# EAGLE board aleph-130128 (EAGLE 6.4), part 1 of 3
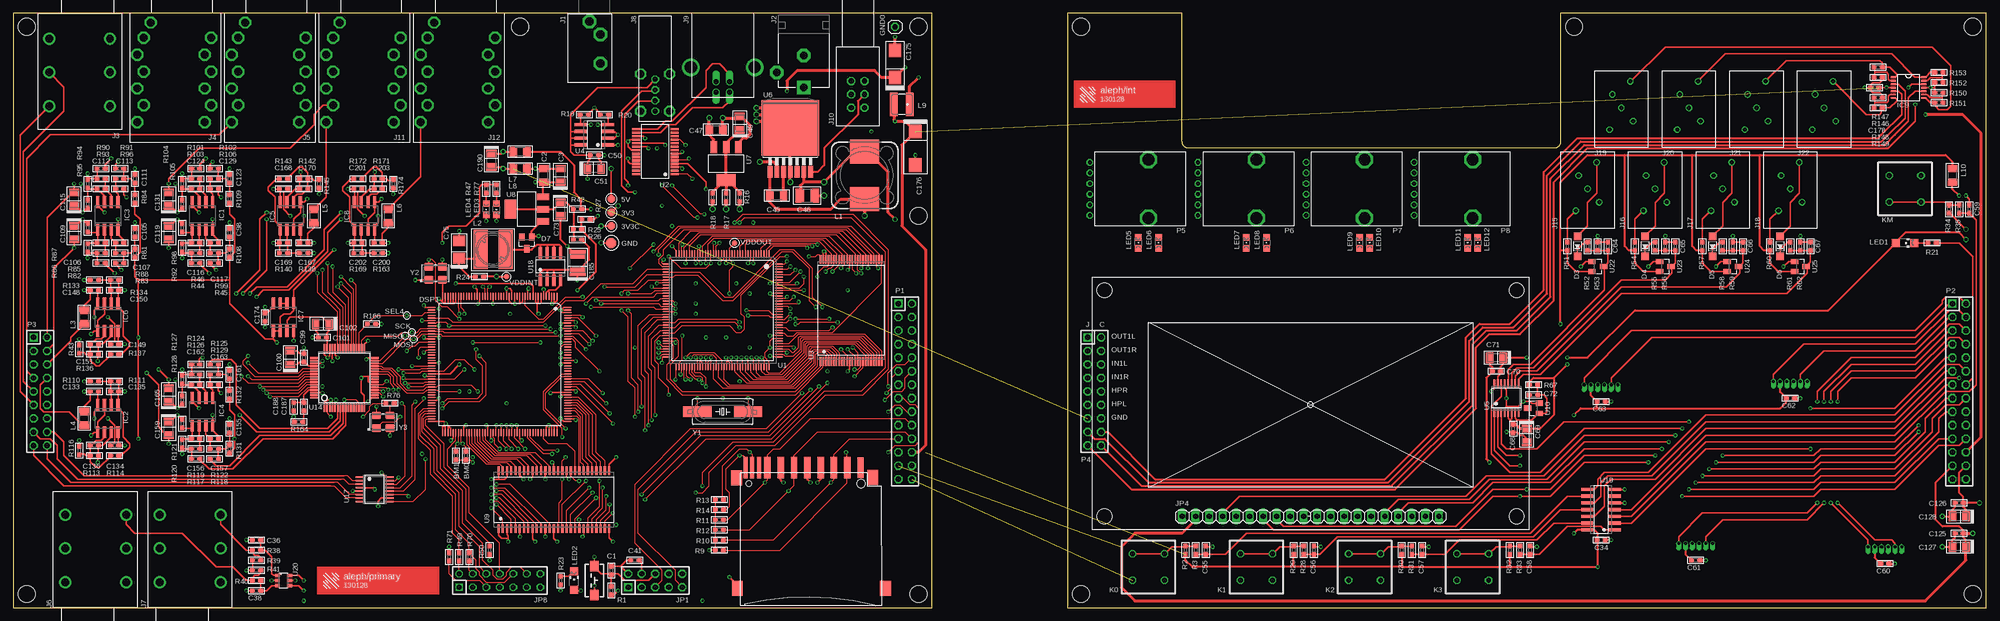
[diagram p0: board, top side]
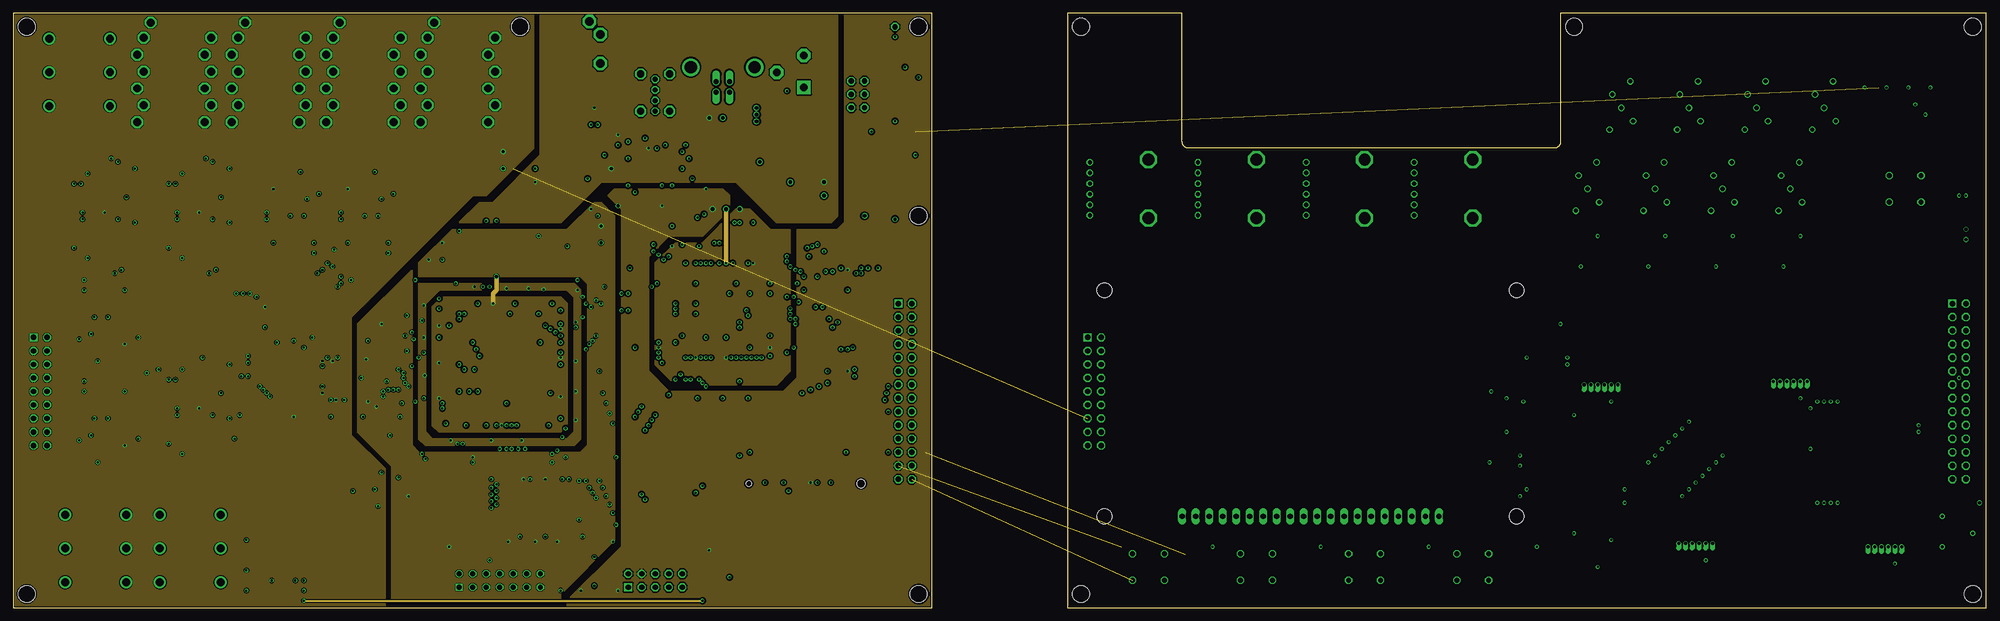
[diagram p1: board, inner layer Route2]
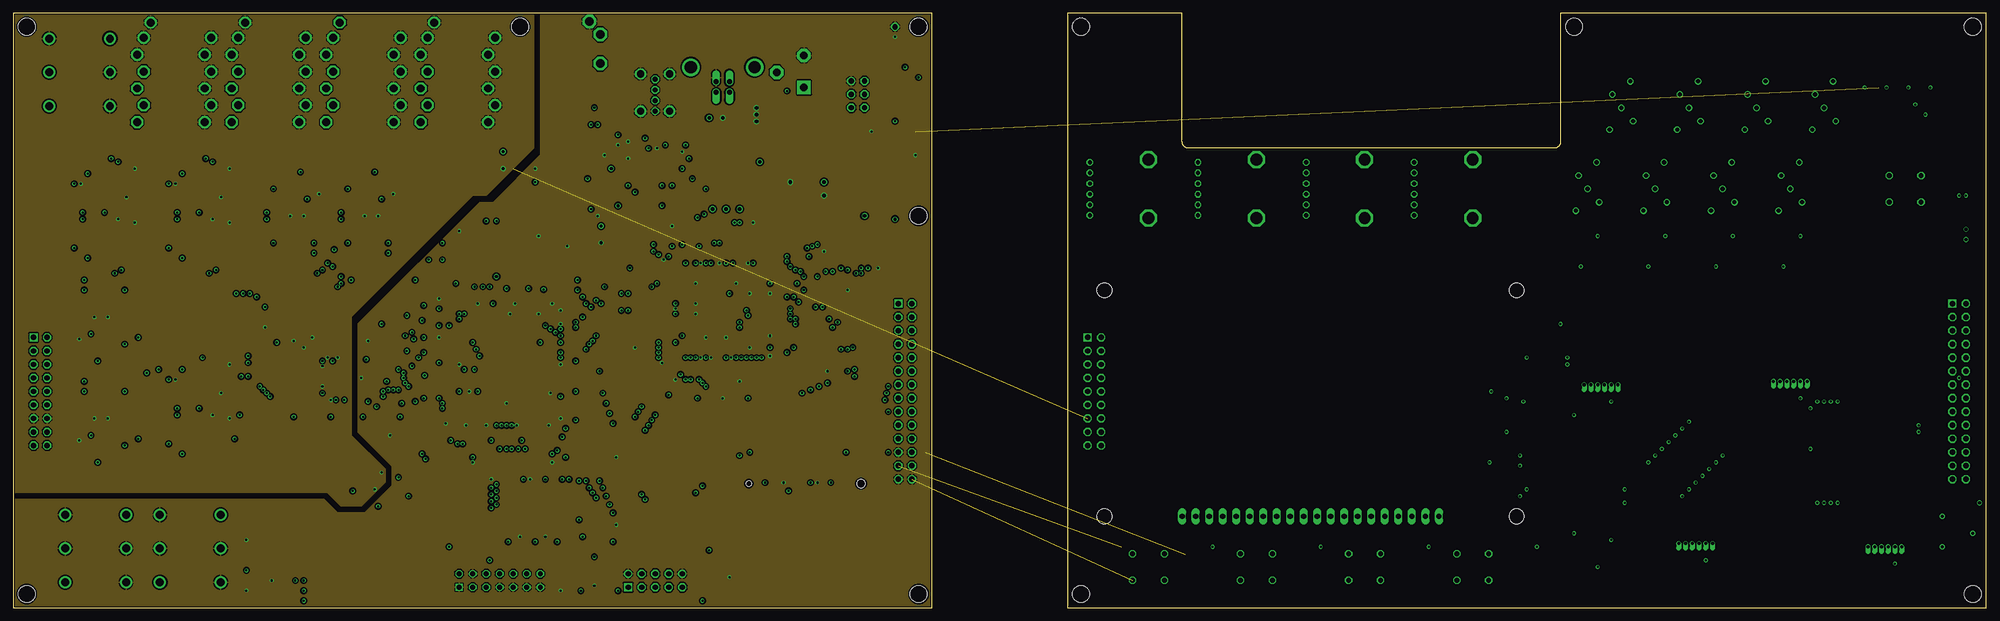
[diagram p2: board, inner layer Route3]
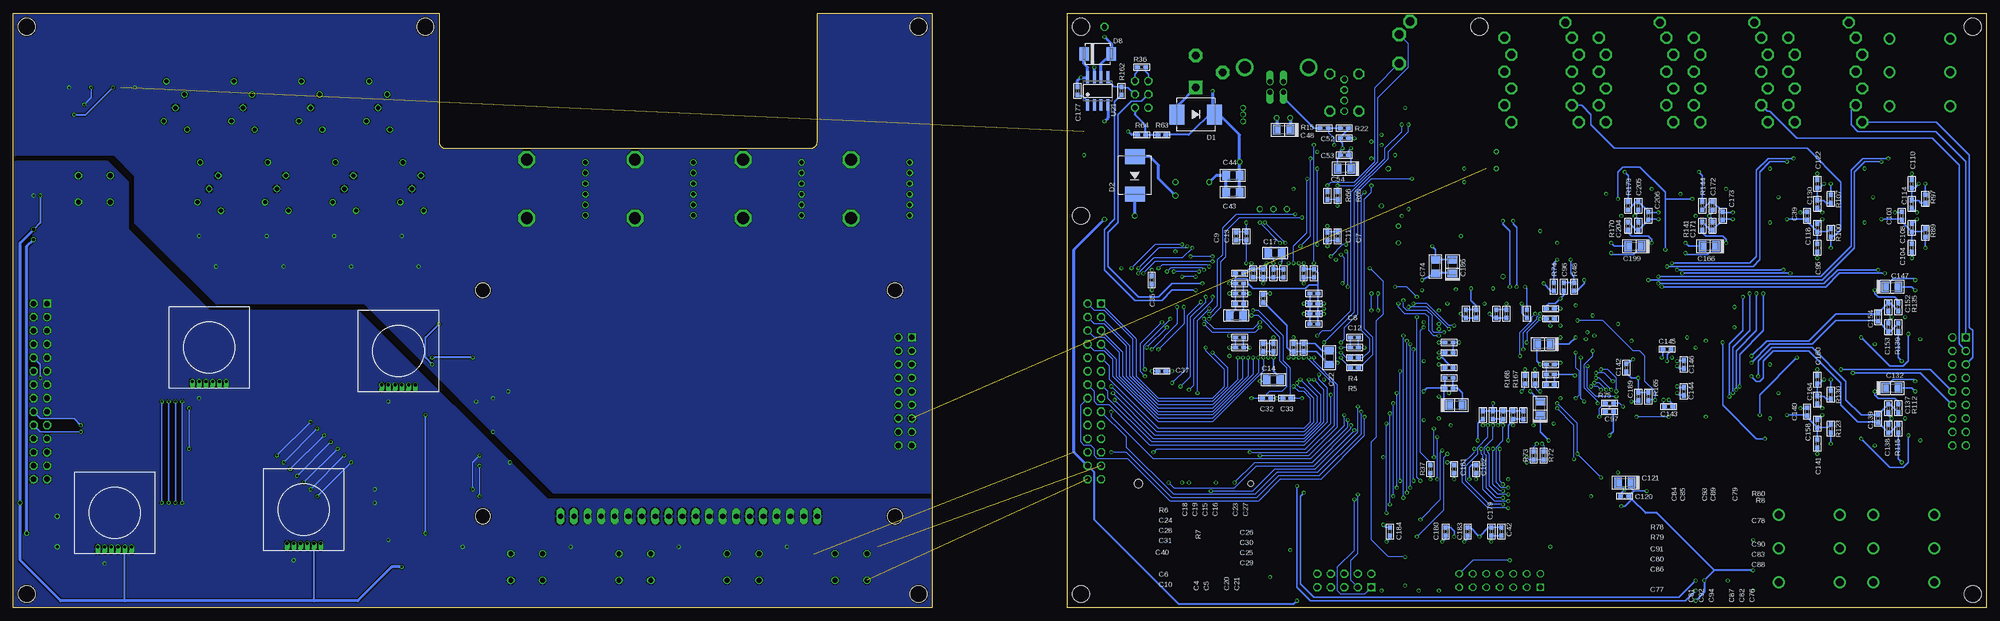
[diagram p3: board, bottom side, seen from below]

Size 370.84 x 111.76 mm. Coordinates in mm from the lower left corner, seen from the top.
Outline: 0,0 172.72,0 172.72,111.76 0,111.76 0,0
Outline: 198.12,0 370.84,0 370.84,111.76 290.83,111.76 290.83,87.63 arc-90 289.56,86.36 220.98,86.36 arc-90 219.71,87.63 219.71,111.76 198.12,111.76 198.12,0
Copper layers (1*2+3*16): Top 0.035mm / dielectric 1.5mm / Route2 0.035mm / dielectric 0.15mm / Route3 0.035mm / dielectric 0.2mm / Bottom 0.035mm
Design rules "default *": minimum track width 6mil, minimum drill 15mil, track to track 6mil, track to pad 6mil, pad to pad 6mil, via to via 6mil, smd to smd 6mil, copper to edge 10mil, drill to drill 8mil, minimum pad ring 6mil, minimum via ring 6mil, stop-mask expansion 4mil, vias tented up to drill 0mil, thermal gap 10mil
Holes 3.2 mm at 170.18,109.22 2.54,109.22 2.54,2.54 170.18,2.54 170.18,73.66 200.66,2.54 200.66,109.22 368.3,109.22 368.3,2.54 293.37,109.22 95.25,109.22
Holes 2.8 mm at 205.1,59.69 282.57,59.69 282.57,17.14 205.1,17.14

## Footprints (pad centres in the part's own frame; a part is rotated, then mirrored left to right if it is on the bottom)
SMD-15R = smd 1.5 x 1.5: TP 0,0
R0603 = smd 0.9 x 0.8: 1 -0.762,0; 2 0.762,0
C0603 = smd 0.9 x 0.8: 1 -0.762,0; 2 0.762,0
C1206 = smd 1.4 x 1.8: 1 -1.27,0; 2 1.27,0
C1206/T = smd 1.4 x 1.9: + 1.27,0; - -1.27,0
C3225 = smd 1.6 x 2.7: 1 -1.397,0; 2 1.397,0
C3528/T = smd 2 x 2.2: + 1.651,0; - -1.651,0
C6032/T = smd 2.6 x 2.2: + 2.54,0; - -2.54,0
C7343/T = smd 2.6 x 2.4: + 3.175,0; - -3.175,0
C1210/T = smd 1.6 x 3: + 1.651,0; - -1.651,0
SMC = smd 2.8 x 3.8: A 3.493,0; C -3.493,0
SOD123 = smd 1.4 x 1.4: A 1.905,0; C -1.905,0
SOT23 = smd 1 x 1.4: 1 -0.95,-1.1; 2 0.95,-1.1; 3 0,1.1
SMB403A = smd 1.778 x 2.54: A 2.54,0; C -2.54,0
LQFP176 = smd 1.5 x 0.25: P$1 -12.8,10.75; P$2 -12.8,10.25; P$3 -12.8,9.75; P$4 -12.8,9.25; P$5 -12.8,8.75; P$6 -12.8,8.25; P$7 -12.8,7.75; P$8 -12.8,7.25; P$9 -12.8,6.75; P$10 -12.8,6.25; P$11 -12.8,5.75; P$12 -12.8,5.25; P$13 -12.8,4.75; P$14 -12.8,4.25; P$15 -12.8,3.75; P$16 -12.8,3.25; P$17 -12.8,2.75; P$18 -12.8,2.25; P$19 -12.8,1.75; P$20 -12.8,1.25; P$21 -12.8,0.75; P$22 -12.8,0.25; P$23 -12.8,-0.25; P$24 -12.8,-0.75; P$25 -12.8,-1.25; P$26 -12.8,-1.75; P$27 -12.8,-2.25; P$28 -12.8,-2.75; P$29 -12.8,-3.25; P$30 -12.8,-3.75; P$31 -12.8,-4.25; P$32 -12.8,-4.75; P$33 -12.8,-5.25; P$34 -12.8,-5.75; P$35 -12.8,-6.25; P$36 -12.8,-6.75; P$37 -12.8,-7.25; P$38 -12.8,-7.75; P$39 -12.8,-8.25; P$40 -12.8,-8.75; P$41 -12.8,-9.25; P$42 -12.8,-9.75; P$43 -12.8,-10.25; P$44 -12.8,-10.75; P$89 12.8,-10.75; P$90 12.8,-10.25; P$91 12.8,-9.75; P$92 12.8,-9.25; P$93 12.8,-8.75; P$94 12.8,-8.25; P$95 12.8,-7.75; P$96 12.8,-7.25; P$97 12.8,-6.75; P$98 12.8,-6.25; P$99 12.8,-5.75; P$100 12.8,-5.25; P$101 12.8,-4.75; P$102 12.8,-4.25; P$103 12.8,-3.75; P$104 12.8,-3.25; P$105 12.8,-2.75; P$106 12.8,-2.25; P$107 12.8,-1.75; P$108 12.8,-1.25; P$109 12.8,-0.75; P$110 12.8,-0.25; P$111 12.8,0.25; P$112 12.8,0.75; P$113 12.8,1.25; P$114 12.8,1.75; P$115 12.8,2.25; P$116 12.8,2.75; P$117 12.8,3.25; P$118 12.8,3.75; P$119 12.8,4.25; P$120 12.8,4.75; P$121 12.8,5.25; P$122 12.8,5.75; P$123 12.8,6.25; P$124 12.8,6.75; P$125 12.8,7.25; P$126 12.8,7.75; P$127 12.8,8.25; P$128 12.8,8.75; P$129 12.8,9.25; P$130 12.8,9.75; P$131 12.8,10.25; P$132 12.8,10.75 | smd 0.25 x 1.5: P$45 -10.75,-12.8; P$46 -10.25,-12.8; P$47 -9.75,-12.8; P$48 -9.25,-12.8; P$49 -8.75,-12.8; P$50 -8.25,-12.8; P$51 -7.75,-12.8; P$52 -7.25,-12.8; P$53 -6.75,-12.8; P$54 -6.25,-12.8; P$55 -5.75,-12.8; P$56 -5.25,-12.8; P$57 -4.75,-12.8; P$58 -4.25,-12.8; P$59 -3.75,-12.8; P$60 -3.25,-12.8; P$61 -2.75,-12.8; P$62 -2.25,-12.8; P$63 -1.75,-12.8; P$64 -1.25,-12.8; P$65 -0.75,-12.8; P$66 -0.25,-12.8; P$67 0.25,-12.8; P$68 0.75,-12.8; P$69 1.25,-12.8; P$70 1.75,-12.8; P$71 2.25,-12.8; P$72 2.75,-12.8; P$73 3.25,-12.8; P$74 3.75,-12.8; P$75 4.25,-12.8; P$76 4.75,-12.8; P$77 5.25,-12.8; P$78 5.75,-12.8; P$79 6.25,-12.8; P$80 6.75,-12.8; P$81 7.25,-12.8; P$82 7.75,-12.8; P$83 8.25,-12.8; P$84 8.75,-12.8; P$85 9.25,-12.8; P$86 9.75,-12.8; P$87 10.25,-12.8; P$88 10.75,-12.8; P$133 10.75,12.8; P$134 10.25,12.8; P$135 9.75,12.8; P$136 9.25,12.8; P$137 8.75,12.8; P$138 8.25,12.8; P$139 7.75,12.8; P$140 7.25,12.8; P$141 6.75,12.8; P$142 6.25,12.8; P$143 5.75,12.8; P$144 5.25,12.8; P$145 4.75,12.8; P$146 4.25,12.8; P$147 3.75,12.8; P$148 3.25,12.8; P$149 2.75,12.8; P$150 2.25,12.8; P$151 1.75,12.8; P$152 1.25,12.8; P$153 0.75,12.8; P$154 0.25,12.8; P$155 -0.25,12.8; P$156 -0.75,12.8; P$157 -1.25,12.8; P$158 -1.75,12.8; P$159 -2.25,12.8; P$160 -2.75,12.8; P$161 -3.25,12.8; P$162 -3.75,12.8; P$163 -4.25,12.8; P$164 -4.75,12.8; P$165 -5.25,12.8; P$166 -5.75,12.8; P$167 -6.25,12.8; P$168 -6.75,12.8; P$169 -7.25,12.8; P$170 -7.75,12.8; P$171 -8.25,12.8; P$172 -8.75,12.8; P$173 -9.25,12.8; P$174 -9.75,12.8; P$175 -10.25,12.8; P$176 -10.75,12.8
SMD-20R = smd 2 x 2: TP 0,0
1X01 = drill 1.016 octagon: 1 0,0
SO8 = smd 0.6 x 2.2: 1 -1.905,-2.6; 2 -0.635,-2.6; 3 0.635,-2.6; 4 1.905,-2.6; 5 1.905,2.6; 6 0.635,2.6; 7 -0.635,2.6; 8 -1.905,2.6
TSSOP14 = smd 0.9 x 0.35: 1 -2.875,1.95; 2 -2.875,1.3; 3 -2.875,0.65; 4 -2.875,0; 5 -2.875,-0.65; 6 -2.875,-1.3; 7 -2.875,-1.95; 8 2.875,-1.95; 9 2.875,-1.3; 10 2.875,-0.65; 11 2.875,0; 12 2.875,0.65; 13 2.875,1.3; 14 2.875,1.95
SJ1-3533NG = drill 1.6 pad 2.54 octagon: 1 -1,-0.9; 2 1.4,1.1; 3 6.9,1.1
PJ-102XH = drill 1.422 pad 2.54 square: 1 0,0 | drill 1.422 pad 2.54 octagon: 2 0,-6.032; 3 5.08,-2.857
NEUTRIK-NRJ6HM-1 = drill 1.5: R 7.23,11.1; RN -4.2,11.1; S 7.23,4.75; SN -4.2,4.75; T 7.23,17.45; TN -4.2,17.45
NSJ12HF = drill 1.5 octagon: G -1.73,5.96; RB -10.95,7.23; RNB -10.95,-5.47; RNT -14.13,-4.2; RT -14.13,8.5; SB -4.606,7.23; SNB -4.606,-5.47; SNT -7.78,-4.2; ST -7.78,8.5; TB -17.3,7.23; TNB -17.3,-5.47; TNT -20.48,-4.2; TT -20.48,8.5
USBA-VERT = drill 0.92 octagon: 1 0,-6; 2 0,-4; 3 0,-2; 4 0,0 | drill 1.35 octagon: G1 -2.72,0; G2 -2.72,-7; G3 2.72,-7; G4 2.72,0
USB_B = drill 0.95 offset: DM -1.25,4.71; DP -1.25,2.71; GND 1.25,2.71; VCC 1.25,4.71 | drill 2.3: MOUNT1 -6,0; MOUNT2 6,0
PHA2U = drill 1 octagon: 0 -1.25,0; 1 -1.25,-2.5; 2 -1.25,2.5; _0 1.25,0; _1 1.25,-2.5; _2 1.25,2.5
STX-3680 = drill 0.8: 1 -2.2,-4.1; 2 2.2,-2.5; 3 -1.7,2.5; 4 1.7,5; 5 0,0
AVR-JTAG-10 = drill 1.016 square: 1 -5.08,-1.27 | drill 1.016 octagon: 2 -5.08,1.27; 3 -2.54,-1.27; 4 -2.54,1.27; 5 0,-1.27; 6 0,1.27; 7 2.54,-1.27; 8 2.54,1.27; 9 5.08,-1.27; 10 5.08,1.27
1X20 = drill 1.016 long: 1 -24.13,0; 2 -21.59,0; 3 -19.05,0; 4 -16.51,0; 5 -13.97,0; 6 -11.43,0; 7 -8.89,0; 8 -6.35,0; 9 -3.81,0; 10 -1.27,0; 11 1.27,0; 12 3.81,0; 13 6.35,0; 14 8.89,0; 15 11.43,0; 16 13.97,0; 17 16.51,0; 18 19.05,0; 19 21.59,0; 20 24.13,0
JPQ-07 = drill 0.914 square: 1 -7.62,-1.27 | drill 0.914 octagon: 2 -7.62,1.27; 3 -5.08,-1.27; 4 -5.08,1.27; 5 -2.54,-1.27; 6 -2.54,1.27; 7 0,-1.27; 8 0,1.27; 9 2.54,-1.27; 10 2.54,1.27; 11 5.08,-1.27; 12 5.08,1.27; 13 7.62,-1.27; 14 7.62,1.27
PVA1 = drill 0.9 octagon: 1 -3,-2.5; 2 -3,2.5; 3 3,2.5; 4 3,-2.5
MSS1278 = smd 5.5 x 4.5: 1 0,4.5; 2 0,-4.5
SRR6038 = smd 7.3 x 2.6: 1 0,2.35; 2 0,-2.35
L1206 = smd 1.4 x 1.8: 1 -1.27,0; 2 1.27,0
LPS4018 = smd 1.45 x 4.4: 1 -1.5,0; 2 1.5,0
CHIPLED_1206 = smd 1.5 x 1.5: A 0,-1.75; C 0,1.75
CHIPLED_0805 = smd 1.2 x 1.2: A 0,-1.05; C 0,1.05
DIL-100-2X14 = drill 1.016 square: 1 -16.51,-1.27 | drill 1.016 octagon: 2 -16.51,1.27; 3 -13.97,-1.27; 4 -13.97,1.27; 5 -11.43,-1.27; 6 -11.43,1.27; 7 -8.89,-1.27; 8 -8.89,1.27; 9 -6.35,-1.27; 10 -6.35,1.27; 11 -3.81,-1.27; 12 -3.81,1.27; 13 -1.27,-1.27; 14 -1.27,1.27; 15 1.27,-1.27; 16 1.27,1.27; 17 3.81,-1.27; 18 3.81,1.27; 19 6.35,-1.27; 20 6.35,1.27; 21 8.89,-1.27; 22 8.89,1.27; 23 11.43,-1.27; 24 11.43,1.27; 25 13.97,-1.27; 26 13.97,1.27; 27 16.51,-1.27; 28 16.51,1.27
DIL-100-2X09 = drill 1.016 square: 1 -10.16,-1.27 | drill 1.016 octagon: 2 -10.16,1.27; 3 -7.62,-1.27; 4 -7.62,1.27; 5 -5.08,-1.27; 6 -5.08,1.27; 7 -2.54,-1.27; 8 -2.54,1.27; 9 0,-1.27; 10 0,1.27; 11 2.54,-1.27; 12 2.54,1.27; 13 5.08,-1.27; 14 5.08,1.27; 15 7.62,-1.27; 16 7.62,1.27; 17 10.16,-1.27; 18 10.16,1.27
EVJ-POT = drill 0.8 octagon: 1 -5,-11; 2 -3,-11; 3 -1,-11; 4 1,-11; 5 3,-11; 6 5,-11 | drill 2.2 octagon: M1 -5.5,0; M2 5.5,0
LQFP144 = smd 0.25 x 1.5: 1 -8.75,-10.6; 2 -8.25,-10.6; 3 -7.75,-10.6; 4 -7.25,-10.6; 5 -6.75,-10.6; 6 -6.25,-10.6; 7 -5.75,-10.6; 8 -5.25,-10.6; 9 -4.75,-10.6; 10 -4.25,-10.6; 11 -3.75,-10.6; 12 -3.25,-10.6; 13 -2.75,-10.6; 14 -2.25,-10.6; 15 -1.75,-10.6; 16 -1.25,-10.6; 17 -0.75,-10.6; 18 -0.25,-10.6; 19 0.25,-10.6; 20 0.75,-10.6; 21 1.25,-10.6; 22 1.75,-10.6; 23 2.25,-10.6; 24 2.75,-10.6; 25 3.25,-10.6; 26 3.75,-10.6; 27 4.25,-10.6; 28 4.75,-10.6; 29 5.25,-10.6; 30 5.75,-10.6; 31 6.25,-10.6; 32 6.75,-10.6; 33 7.25,-10.6; 34 7.75,-10.6; 35 8.25,-10.6; 36 8.75,-10.6; 73 8.75,10.6; 74 8.25,10.6; 75 7.75,10.6; 76 7.25,10.6; 77 6.75,10.6; 78 6.25,10.6; 79 5.75,10.6; 80 5.25,10.6; 81 4.75,10.6; 82 4.25,10.6; 83 3.75,10.6; 84 3.25,10.6; 85 2.75,10.6; 86 2.25,10.6; 87 1.75,10.6; 88 1.25,10.6; 89 0.75,10.6; 90 0.25,10.6; 91 -0.25,10.6; 92 -0.75,10.6; 93 -1.25,10.6; 94 -1.75,10.6; 95 -2.25,10.6; 96 -2.75,10.6; 97 -3.25,10.6; 98 -3.75,10.6; 99 -4.25,10.6; 100 -4.75,10.6; 101 -5.25,10.6; 102 -5.75,10.6; 103 -6.25,10.6; 104 -6.75,10.6; 105 -7.25,10.6; 106 -7.75,10.6; 107 -8.25,10.6; 108 -8.75,10.6 | smd 1.5 x 0.25: 37 10.6,-8.75; 38 10.6,-8.25; 39 10.6,-7.75; 40 10.6,-7.25; 41 10.6,-6.75; 42 10.6,-6.25; 43 10.6,-5.75; 44 10.6,-5.25; 45 10.6,-4.75; 46 10.6,-4.25; 47 10.6,-3.75; 48 10.6,-3.25; 49 10.6,-2.75; 50 10.6,-2.25; 51 10.6,-1.75; 52 10.6,-1.25; 53 10.6,-0.75; 54 10.6,-0.25; 55 10.6,0.25; 56 10.6,0.75; 57 10.6,1.25; 58 10.6,1.75; 59 10.6,2.25; 60 10.6,2.75; 61 10.6,3.25; 62 10.6,3.75; 63 10.6,4.25; 64 10.6,4.75; 65 10.6,5.25; 66 10.6,5.75; 67 10.6,6.25; 68 10.6,6.75; 69 10.6,7.25; 70 10.6,7.75; 71 10.6,8.25; 72 10.6,8.75; 109 -10.6,8.75; 110 -10.6,8.25; 111 -10.6,7.75; 112 -10.6,7.25; 113 -10.6,6.75; 114 -10.6,6.25; 115 -10.6,5.75; 116 -10.6,5.25; 117 -10.6,4.75; 118 -10.6,4.25; 119 -10.6,3.75; 120 -10.6,3.25; 121 -10.6,2.75; 122 -10.6,2.25; 123 -10.6,1.75; 124 -10.6,1.25; 125 -10.6,0.75; 126 -10.6,0.25; 127 -10.6,-0.25; 128 -10.6,-0.75; 129 -10.6,-1.25; 130 -10.6,-1.75; 131 -10.6,-2.25; 132 -10.6,-2.75; 133 -10.6,-3.25; 134 -10.6,-3.75; 135 -10.6,-4.25; 136 -10.6,-4.75; 137 -10.6,-5.25; 138 -10.6,-5.75; 139 -10.6,-6.25; 140 -10.6,-6.75; 141 -10.6,-7.25; 142 -10.6,-7.75; 143 -10.6,-8.25; 144 -10.6,-8.75
SSOP28 = smd 0.4 x 1.5: 1 -4.225,-3.625; 2 -3.575,-3.625; 3 -2.925,-3.625; 4 -2.275,-3.625; 5 -1.625,-3.625; 6 -0.975,-3.625; 7 -0.325,-3.625; 8 0.325,-3.625; 9 0.975,-3.625; 10 1.625,-3.625; 11 2.275,-3.625; 12 2.925,-3.625; 13 3.575,-3.625; 14 4.225,-3.625; 15 4.225,3.625; 16 3.575,3.625; 17 2.925,3.625; 18 2.275,3.625; 19 1.625,3.625; 20 0.975,3.625; 21 0.325,3.625; 22 -0.325,3.625; 23 -0.975,3.625; 24 -1.625,3.625; 25 -2.275,3.625; 26 -2.925,3.625; 27 -3.575,3.625; 28 -4.225,3.625
TSOP48 = smd 0.3 x 1.6: 1 -5.75,-9.6; 2 -5.25,-9.6; 3 -4.75,-9.6; 4 -4.25,-9.6; 5 -3.75,-9.6; 6 -3.25,-9.6; 7 -2.75,-9.6; 8 -2.25,-9.6; 9 -1.75,-9.6; 10 -1.25,-9.6; 11 -0.75,-9.6; 12 -0.25,-9.6; 13 0.25,-9.6; 14 0.75,-9.6; 15 1.25,-9.6; 16 1.75,-9.6; 17 2.25,-9.6; 18 2.75,-9.6; 19 3.25,-9.6; 20 3.75,-9.6; 21 4.25,-9.6; 22 4.75,-9.6; 23 5.25,-9.6; 24 5.75,-9.6; 25 5.75,9.6; 26 5.25,9.6; 27 4.75,9.6; 28 4.25,9.6; 29 3.75,9.6; 30 3.25,9.6; 31 2.75,9.6; 32 2.25,9.6; 33 1.75,9.6; 34 1.25,9.6; 35 0.75,9.6; 36 0.25,9.6; 37 -0.25,9.6; 38 -0.75,9.6; 39 -1.25,9.6; 40 -1.75,9.6; 41 -2.25,9.6; 42 -2.75,9.6; 43 -3.25,9.6; 44 -3.75,9.6; 45 -4.25,9.6; 46 -4.75,9.6; 47 -5.25,9.6; 48 -5.75,9.6
SO08 = smd 0.6 x 2.2: 1 -1.905,-2.6; 2 -0.635,-2.6; 3 0.635,-2.6; 4 1.905,-2.6; 5 1.905,2.6; 6 0.635,2.6; 7 -0.635,2.6; 8 -1.905,2.6
TSSOP16 = smd 0.3 x 1.5: 1 -2.275,-2.8; 2 -1.625,-2.8; 3 -0.975,-2.8; 4 -0.325,-2.8; 5 0.325,-2.8; 6 0.975,-2.8; 7 1.625,-2.8; 8 2.275,-2.8; 9 2.275,2.8; 10 1.625,2.8; 11 0.975,2.8; 12 0.325,2.8; 13 -0.325,2.8; 14 -0.975,2.8; 15 -1.625,2.8; 16 -2.275,2.8
TO263-7 = smd 0.914 x 2.159: 1 -3.81,-5.715; 2 -2.54,-5.715; 3 -1.27,-5.715; 4 0,-5.715; 5 1.27,-5.715; 6 2.54,-5.715; 7 3.81,-5.715 | smd 10.8 x 10.41: 8 0,2.54
SOT223 = smd 1.219 x 2.235: 1 -2.311,-3.099; 2 0,-3.099; 3 2.311,-3.099 | smd 3.6 x 2.2: 4 0,3.099
TSOP54 = smd 0.4 x 1.6: 1 -10.4,-5.45; 2 -9.6,-5.45; 3 -8.8,-5.45; 4 -8,-5.45; 5 -7.2,-5.45; 6 -6.4,-5.45; 7 -5.6,-5.45; 8 -4.8,-5.45; 9 -4,-5.45; 10 -3.2,-5.45; 11 -2.4,-5.45; 12 -1.6,-5.45; 13 -0.8,-5.45; 14 0,-5.45; 15 0.8,-5.45; 16 1.6,-5.45; 17 2.4,-5.45; 18 3.2,-5.45; 19 4,-5.45; 20 4.8,-5.45; 21 5.6,-5.45; 22 6.4,-5.45; 23 7.2,-5.45; 24 8,-5.45; 25 8.8,-5.45; 26 9.6,-5.45; 27 10.4,-5.45; 28 10.4,5.45; 29 9.6,5.45; 30 8.8,5.45; 31 8,5.45; 32 7.2,5.45; 33 6.4,5.45; 34 5.6,5.45; 35 4.8,5.45; 36 4,5.45; 37 3.2,5.45; 38 2.4,5.45; 39 1.6,5.45; 40 0.8,5.45; 41 0,5.45; 42 -0.8,5.45; 43 -1.6,5.45; 44 -2.4,5.45; 45 -3.2,5.45; 46 -4,5.45; 47 -4.8,5.45; 48 -5.6,5.45; 49 -6.4,5.45; 50 -7.2,5.45; 51 -8,5.45; 52 -8.8,5.45; 53 -9.6,5.45; 54 -10.4,5.45
SQFP-S-10X10-64 = smd 0.3 x 1.6: 1 -3.75,-5.6; 2 -3.25,-5.6; 3 -2.75,-5.6; 4 -2.25,-5.6; 5 -1.75,-5.6; 6 -1.25,-5.6; 7 -0.75,-5.6; 8 -0.25,-5.6; 9 0.25,-5.6; 10 0.75,-5.6; 11 1.25,-5.6; 12 1.75,-5.6; 13 2.25,-5.6; 14 2.75,-5.6; 15 3.25,-5.6; 16 3.75,-5.6; 33 3.75,5.6; 34 3.25,5.6; 35 2.75,5.6; 36 2.25,5.6; 37 1.75,5.6; 38 1.25,5.6; 39 0.75,5.6; 40 0.25,5.6; 41 -0.25,5.6; 42 -0.75,5.6; 43 -1.25,5.6; 44 -1.75,5.6; 45 -2.25,5.6; 46 -2.75,5.6; 47 -3.25,5.6; 48 -3.75,5.6 | smd 1.6 x 0.3: 17 5.6,-3.75; 18 5.6,-3.25; 19 5.6,-2.75; 20 5.6,-2.25; 21 5.6,-1.75; 22 5.6,-1.25; 23 5.6,-0.75; 24 5.6,-0.25; 25 5.6,0.25; 26 5.6,0.75; 27 5.6,1.25; 28 5.6,1.75; 29 5.6,2.25; 30 5.6,2.75; 31 5.6,3.25; 32 5.6,3.75; 49 -5.6,3.75; 50 -5.6,3.25; 51 -5.6,2.75; 52 -5.6,2.25; 53 -5.6,1.75; 54 -5.6,1.25; 55 -5.6,0.75; 56 -5.6,0.25; 57 -5.6,-0.25; 58 -5.6,-0.75; 59 -5.6,-1.25; 60 -5.6,-1.75; 61 -5.6,-2.25; 62 -5.6,-2.75; 63 -5.6,-3.25; 64 -5.6,-3.75
SO14 = smd 0.6 x 2.2: 1 -3.81,-2.6; 2 -2.54,-2.6; 3 -1.27,-2.6; 4 0,-2.6; 5 1.27,-2.6; 6 2.54,-2.6; 7 3.81,-2.6; 8 3.81,2.6; 9 2.54,2.6; 10 1.27,2.6; 11 0,2.6; 12 -1.27,2.6; 13 -2.54,2.6; 14 -3.81,2.6
SOT23-6 = smd 0.6 x 0.9: 1 -0.95,-1.15; 2 0,-1.15; 3 0.95,-1.15; 4 0.95,1.15; 5 0,1.15; 6 -0.95,1.15
PANASONIC-EVQ = smd 2 x 1.6: 1 2.7,0; 2 -2.7,0
BOURNS-EM14 = drill 0.6 pad 0.813 offset: P$1 -3.175,-6.35; P$2 -1.905,-6.35; P$3 -0.635,-6.35; P$4 0.635,-6.35; P$5 1.905,-6.35; P$6 3.175,-6.35
06132 = smd 1.2 x 4: 1 6.9,0.9; 2 4.4,0.9; 3 1.9,0.9; 4 -0.6,0.9; 5 -3.1,0.9; 6 -5.6,0.9; 7 -8.1,0.9 | smd 0.7 x 4: 8 -9.7,0.9; CD -11,0.9; WP -12.2,0.9 | smd 1.2 x 3.81: 9 9.4,0.9 | smd 2 x 2.8: GP -13.8,-21.8; GP2 14.1,-21.8; GP3 11.7,-0.9; GP4 -13.9,-1 | hole 1.1: -11.6,-2.1 | hole 1.6: 9.5,-2.1
SMD-10R = smd 1 x 1: TP 0,0
HC49UP@1 = smd 5.334 x 1.93: 1 -4.763,0; 2 4.763,0
ASFL1 = smd 1.7 x 1.5: 1 -1.27,-1.2; 2 1.27,-1.2; 3 1.27,1.2; 4 -1.27,1.2

## Placement (x,y rotation side)
3V3  TPS-SMD-15R  [SMD-15R]  112.39,74.3 0 top
3V3C  TPS-SMD-15R  [SMD-15R]  112.39,71.75 0 top
5V  TPS-SMD-15R  [SMD-15R]  112.39,76.83 0 top
BM0  0  [R0603]  85.09,28.57 90 top
BM1  DNP  [R0603]  83.19,28.57 90 top
C1  100n  [C0603]  112.39,6.99 90 top
C2  100n  [C1206]  99.69,81.28 270 top
C3  10u  [C1206/T]  102.87,81.28 270 top
C4  100n  [C0603]  135.89,48.9 90 bottom
C5  33n  [C0603]  133.99,48.9 90 bottom
C6  100n  [C0603]  140.34,50.8 0 bottom
C7  100n  [C0603]  121.92,69.85 90 bottom
C8  100n  [C0603]  118.75,50.8 0 bottom
C9  100n  [C0603]  140.97,69.85 90 bottom
C10  33n  [C0603]  140.34,48.9 0 bottom
C11  33n  [C0603]  123.83,69.85 90 bottom
C12  33n  [C0603]  118.75,48.9 0 bottom
C13  33n  [C0603]  139.06,69.85 90 bottom
C14  4.7u  [C1206]  133.99,42.86 180 bottom
C15  33n  [C0603]  133.99,62.87 270 bottom
C16  100n  [C0603]  132.08,62.87 270 bottom
C17  4.7u  [C1206]  133.67,66.67 0 bottom
C18  2.2u  [C0603]  137.79,62.87 270 bottom
C19  470p  [C0603]  135.89,62.87 270 bottom
C20  2.7n  [C0603]  130.18,48.9 90 bottom
C21  33n  [C0603]  128.27,48.9 90 bottom
C22  2.2u  [C1206]  123.51,46.99 90 bottom
C23  2.7n  [C0603]  128.27,62.87 270 bottom
C24  2.7n  [C0603]  140.34,60.96 0 bottom
C25  2.7n  [C0603]  126.36,55.24 180 bottom
C26  2.7n  [C0603]  126.36,59.05 180 bottom
C27  33n  [C0603]  126.36,62.87 270 bottom
C28  33n  [C0603]  140.34,59.05 0 bottom
C29  33n  [C0603]  126.36,53.34 180 bottom
C30  33n  [C0603]  126.36,57.15 180 bottom
C31  100n  [C0603]  140.34,57.15 0 bottom
C32  18p  [C0603]  135.25,39.37 0 bottom
C33  18p  [C0603]  131.44,39.37 180 bottom
C34  100n  [C0603]  298.45,12.7 180 top
C35  10n  [C0603]  156.84,61.59 270 bottom
C36  1u  [C0603]  45.72,12.7 0 top
C37  10n  [C0603]  154.94,44.45 0 bottom
C38  1u  [C0603]  45.72,3.17 0 top
C39  100n  [C0603]  33.66,73.66 90 bottom
C40  2.2u  [C1206]  140.97,54.93 0 bottom
C41  100n  [C0603]  116.84,8.89 180 top
C42  10n  [C0603]  91.12,14.29 270 bottom
C43  22u  [C1206]  141.6,78.11 0 bottom
C44  470n  [C1206]  141.6,81.28 0 bottom
C45  10n  [C1206]  143.51,77.47 0 top
C46  47u  [C3225]  149.22,77.47 0 top
C47  100n  [C1206]  132.08,89.85 180 top
C48  10u  [C1206/T]  132.08,89.85 0 bottom
C49  10u  [C1206/T]  136.53,91.12 270 top
C50  100n  [C0603]  109.22,85.09 180 top
C51  4.7u  [C1206/T]  109.22,82.55 180 top
C52  100n  [C0603]  120.65,88.27 0 bottom
C53  100n  [C0603]  120.65,85.09 0 bottom
C54  4.7u  [C1206/T]  120.65,82.55 0 bottom
C55  1u  [C0603]  224.16,10.79 270 top
C56  1u  [C0603]  244.47,10.79 270 top
C57  1u  [C0603]  264.8,10.79 270 top
C58  1u  [C0603]  285.12,10.79 270 top
C59  1u  [C0603]  367.67,74.93 270 top
C60  100n  [C0603]  351.79,8.26 180 top
C61  100n  [C0603]  316.23,8.89 180 top
C62  100n  [C0603]  334.01,39.37 180 top
C63  100n  [C0603]  298.45,38.73 180 top
C64  10n  [C0603]  299.72,67.94 90 top
C65  10n  [C0603]  312.42,67.94 90 top
C66  10n  [C0603]  325.12,67.94 90 top
C67  10n  [C0603]  337.82,67.94 90 top
C68  100n  [C0603]  281.94,33.66 90 top
C69  10u  [C1206/T]  284.48,32.38 90 top
C70  100n  [C0603]  278.76,44.45 0 top
C71  10u  [C1206/T]  278.76,46.99 0 top
C72  100n  [C0603]  285.75,40.01 0 top
C73  10u  [C1206/T]  102.87,74.93 90 top
C74  100n  [C1206]  103.5,64.14 270 bottom
C75  100u  [C3528/T]  83.82,67.31 270 top
C76  10u  [C1206/T]  83.82,37.47 270 bottom
C77  10u  [C1206/T]  99.69,38.1 180 bottom
C78  10u  [C1206/T]  83.19,49.53 0 bottom
C79  100n  [C0603]  86.36,55.24 90 bottom
C80  100n  [C0603]  100.97,43.18 180 bottom
C81  100n  [C0603]  94.61,36.2 270 bottom
C82  100n  [C0603]  88.9,36.2 270 bottom
C83  100n  [C0603]  81.92,43.81 0 bottom
C84  100n  [C0603]  97.79,55.24 90 bottom
C85  10n  [C0603]  95.89,55.24 90 bottom
C86  10n  [C0603]  100.97,41.27 180 bottom
C87  10n  [C0603]  87,36.2 270 bottom
C88  10n  [C0603]  81.92,41.91 0 bottom
C89  100n  [C0603]  90.17,55.24 90 bottom
C90  100n  [C0603]  81.92,45.72 0 bottom
C91  100n  [C0603]  100.97,45.09 0 bottom
C92  100n  [C0603]  92.71,36.2 270 bottom
C93  10n  [C0603]  92.08,55.24 90 bottom
C94  10n  [C0603]  90.81,36.2 270 bottom
C95  330p  [C0603]  31.75,67.63 270 bottom
C96  10n  [C0603]  79.38,60.33 270 bottom
C97  10n  [C0603]  70.8,36.83 0 bottom
C98  680p  [C0603]  40.64,70.48 90 top
C99  100n  [C0603]  54.61,46.99 270 top
C100  47u  [C1206/T]  52.07,46.99 270 top
C101  100n  [C0603]  58.1,50.8 0 top
C102  10u  [C1206/T]  58.1,53.34 0 top
C103  100n  [C0603]  15.88,73.66 90 bottom
C104  330p  [C0603]  13.97,67.63 270 bottom
C105  680p  [C0603]  22.86,70.48 90 top
C106  100p  [C0603]  16.51,68.58 180 top
C107  220p  [C0603]  20,68.58 180 top
C108  2200p  [C0603]  13.97,71.44 90 bottom
C109  10u  [C1206/T]  11.43,70.48 90 top
C110  330p  [C0603]  13.97,79.69 90 bottom
C111  680p  [C0603]  22.86,80.64 90 top
C112  100p  [C0603]  16.51,78.74 180 top
C113  220p  [C0603]  20,78.74 180 top
C114  2200p  [C0603]  13.97,75.88 270 bottom
C115  10u  [C1206/T]  11.43,76.83 270 top
C116  100p  [C0603]  34.29,68.58 180 top
C117  220p  [C0603]  37.78,68.58 180 top
C118  2200p  [C0603]  31.75,71.44 90 bottom
C119  10u  [C1206/T]  29.21,70.48 90 top
C120  100n  [C0603]  67.94,20.95 180 bottom
C121  10u  [C1206/T]  67.94,23.5 0 bottom
C122  330p  [C0603]  31.75,79.69 90 bottom
C123  680p  [C0603]  40.64,80.64 90 top
C124  100p  [C0603]  34.29,78.74 180 top
C125  100n  [C0603]  365.76,13.97 0 top
C126  100n  [C0603]  365.76,19.68 0 top
C127  10u  [C1206/T]  365.76,11.43 0 top
C128  10u  [C1206/T]  365.76,17.14 0 top
C129  220p  [C0603]  37.78,78.74 180 top
C130  2200p  [C0603]  31.75,75.88 270 bottom
C131  10u  [C1206/T]  29.21,76.83 270 top
C132  4.7u  [C1206/T]  17.78,41.27 180 bottom
C133  100p  [C0603]  15.24,40.64 180 top
C134  100n  [C0603]  19.05,30.48 0 top
C135  120p  [C0603]  19.05,40.64 180 top
C136  120p  [C0603]  15.24,30.48 180 top
C137  1n  [C0603]  18.41,37.47 270 bottom
C138  1n  [C0603]  18.41,33.66 270 bottom
C139  100p  [C0603]  20.32,35.56 270 bottom
C140  100n  [C0603]  33.66,36.83 90 bottom
C141  330p  [C0603]  31.75,30.8 270 bottom
C142  100n  [C0603]  67.63,45.09 270 bottom
C143  100n  [C0603]  59.69,37.78 0 bottom
C144  100n  [C0603]  56.83,40.64 90 bottom
C145  100n  [C0603]  60.01,48.58 180 bottom
C146  100n  [C0603]  56.83,45.72 270 bottom
C147  4.7u  [C1206/T]  17.78,60.33 180 bottom
C148  100p  [C0603]  15.24,59.69 180 top
C149  100n  [C0603]  19.05,49.53 0 top
C150  120p  [C0603]  19.05,59.69 180 top
C151  120p  [C0603]  15.24,49.53 180 top
C152  1n  [C0603]  18.41,56.52 270 bottom
C153  1n  [C0603]  18.41,52.7 270 bottom
C154  100p  [C0603]  20.32,54.61 270 bottom
C155  680p  [C0603]  40.64,33.66 90 top
C156  100p  [C0603]  34.29,31.75 180 top
C157  220p  [C0603]  37.78,31.75 180 top
C158  2200p  [C0603]  31.75,34.61 90 bottom
C159  10u  [C1206/T]  29.21,33.66 90 top
C160  330p  [C0603]  31.75,42.86 90 bottom
C161  680p  [C0603]  40.64,43.81 90 top
C162  100p  [C0603]  34.29,41.91 180 top
C163  220p  [C0603]  37.78,41.91 180 top
C164  2200p  [C0603]  31.75,39.05 270 bottom
C165  10u  [C1206/T]  29.21,40.01 270 top
C166  4.7u  [C1206/T]  52.07,67.94 0 bottom
C167  100p  [C0603]  54.61,68.58 0 top
C168  100n  [C0603]  50.8,78.74 180 top
C169  120p  [C0603]  50.8,68.58 0 top
C170  120p  [C0603]  54.61,78.74 0 top
C171  1n  [C0603]  51.44,71.75 90 bottom
C172  1n  [C0603]  51.44,75.56 90 bottom
C173  100p  [C0603]  49.53,73.66 90 bottom
C174  100n  [C0603]  47.31,54.61 90 top
C175  15u  [C6032/T]  165.74,102.23 270 top
C176  68u  [C7343/T]  169.54,86.36 90 top
C177  10n  [C0603]  170.81,97.16 90 bottom
C178  100n  [C0603]  349.88,97.79 180 top
C179  10n  [C0603]  93.03,14.29 270 bottom
C180  10n  [C0603]  101.6,14.29 270 bottom
C181  10n  [C0603]  100.01,26.04 270 bottom
C182  10n  [C0603]  95.89,26.04 270 bottom
C183  10n  [C0603]  97.47,14.29 270 bottom
C184  10n  [C0603]  112.08,14.29 270 bottom
C185  100u  [C1210/T]  106.05,64.77 270 top
C186  10u  [C1206/T]  100.33,64.14 270 bottom
C187  5600p  [C0603]  54.61,37.78 90 top
C188  390p  [C0603]  52.7,37.78 90 top
C189  100n  [C0603]  65.41,39.69 90 bottom
C190  10u  [C1206/T]  89.85,84.14 90 top
C199  4.7u  [C1206/T]  66.04,67.94 0 bottom
C200  100p  [C0603]  68.58,68.58 0 top
C201  100n  [C0603]  64.77,78.74 180 top
C202  120p  [C0603]  64.77,68.58 0 top
C203  120p  [C0603]  68.58,78.74 0 top
C204  1n  [C0603]  65.41,71.75 90 bottom
C205  1n  [C0603]  65.41,75.56 90 bottom
C206  100p  [C0603]  63.5,73.66 90 bottom
D1  MBRS360T3  [SMC]  148.59,92.71 180 bottom
D2  MBRS360T3  [SMC]  160.02,81.28 90 bottom
D3  1N4148W-7  [SOD123]  294,67.94 90 top
D4  1N4148W-7  [SOD123]  306.7,67.94 90 top
D5  1N4148W-7  [SOD123]  319.4,67.94 90 top
D6  1N4148W-7  [SOD123]  332.11,67.94 90 top
D7  zhcs1000  [SOT23]  96.52,68.58 180 top
D8  MBRS130LT3  [SMB403A]  167,104.14 0 bottom
DSP1  BF533  [LQFP176]  91.44,45.72 270 top
GND  TPS-SMD-20R  [SMD-20R]  112.39,68.58 0 top
GND0  [1X01]  165.74,109.22 0 top
IC1  AD8606  [SO8]  35.56,73.66 0 top
IC2  AD8606  [SO8]  17.78,35.56 180 top
IC3  AD8606  [SO8]  17.78,73.66 0 top
IC4  AD8606  [SO8]  35.56,36.83 0 top
IC5  AD8606  [SO8]  52.07,73.66 0 top
IC6  AD8606  [SO8]  17.78,54.61 180 top
IC7  AD8607R  [SO8]  50.8,54.61 0 top
IC8  AD8606  [SO8]  66.04,73.66 0 top
IC9  AD8567  [TSSOP14]  356.24,97.79 0 top
J1  SJ1-3533NG  [SJ1-3533NG]  109.22,109.22 270 top
J2  PJ-102AH/BH  [PJ-102XH]  148.59,97.79 180 top
J3  STEREOSW2GND  [NEUTRIK-NRJ6HM-1]  13.97,111.76 180 top
J4  NSJ12HF  [NSJ12HF]  31.75,111.76 90 top
J5  NSJ12HF  [NSJ12HF]  49.53,111.76 90 top
J6  STEREOSW2GND  [NEUTRIK-NRJ6HM-1]  13.97,0 0 top
J7  STEREOSW2GND  [NEUTRIK-NRJ6HM-1]  31.75,0 0 top
J8  USBA-VERT  [USBA-VERT]  120.65,93.34 180 top
J9  [USB_B]  133.35,101.6 180 top
J10  PHA2U  [PHA2U]  158.75,96.52 180 top
J11  NSJ12HF  [NSJ12HF]  67.31,111.76 90 top
J12  NSJ12HF  [NSJ12HF]  85.09,111.76 90 top
J15  STX-3680  [STX-3680]  295.91,78.74 0 top
J16  STX-3680  [STX-3680]  308.61,78.74 0 top
J17  STX-3680  [STX-3680]  321.31,78.74 0 top
J18  STX-3680  [STX-3680]  334.01,78.74 0 top
J19  STX-3680  [STX-3680]  302.26,93.98 0 top
J20  STX-3680  [STX-3680]  314.96,93.98 0 top
J21  STX-3680  [STX-3680]  327.66,93.98 0 top
J22  STX-3680  [STX-3680]  340.36,93.98 0 top
JP1  AVR-JTAG  [AVR-JTAG-10]  120.65,5.08 0 top
JP4  OLED  [1X20]  243.84,17.14 0 top
JP8  JPQ-07-100  [JPQ-07]  91.44,5.08 0 top
K0  PVA1  [PVA1]  213.36,7.62 180 top
K1  PVA1  [PVA1]  233.68,7.62 180 top
K2  PVA1  [PVA1]  254,7.62 180 top
K3  PVA1  [PVA1]  274.32,7.62 180 top
KM  PVA1  [PVA1]  355.6,78.74 0 top
L1  MSS1278  [MSS1278]  160.02,81.28 180 top
L2  SRR6038-100Y  [SRR6038]  90.17,67.31 270 top
L3  600  [L1206]  13.34,54.61 270 top
L4  600  [L1206]  13.34,35.56 270 top
L5  600  [L1206]  56.52,73.66 90 top
L6  600  [L1206]  70.48,73.66 90 top
L7  600  [L1206]  95.25,85.72 0 top
L8  600  [L1206]  95.25,82.55 0 top
L9  LPS4018-68uh  [LPS4018]  167,94.61 180 top
L10  600  [L1206]  364.49,81.28 270 top
LED1  [CHIPLED_1206]  355.6,68.58 270 top
LED2  [CHIPLED_1206]  105.41,5.08 0 top
LED3  [CHIPLED_0805]  90.81,74.93 180 top
LED4  [CHIPLED_0805]  88.9,74.93 180 top
LED5  [CHIPLED_0805]  211.46,68.58 0 top
LED6  [CHIPLED_0805]  215.26,68.58 0 top
LED7  [CHIPLED_0805]  231.78,68.58 0 top
LED8  [CHIPLED_0805]  235.59,68.58 0 top
LED9  [CHIPLED_0805]  253.05,68.58 0 top
LED10  [CHIPLED_0805]  254.95,68.58 0 top
LED11  [CHIPLED_0805]  273.37,68.58 0 top
LED12  [CHIPLED_0805]  275.27,68.58 0 top
P1  M-2X14-DIL-100  [DIL-100-2X14]  167.64,40.64 270 top
P2  M-2X14-DIL-100  [DIL-100-2X14]  365.76,40.64 270 top
P3  M-2X09-DIL-100  [DIL-100-2X09]  5.08,40.64 270 top
P4  M-2X09-DIL-100  [DIL-100-2X09]  203.2,40.64 270 top
P5  EVJ-POT  [EVJ-POT]  213.36,78.74 270 top
P6  EVJ-POT  [EVJ-POT]  233.68,78.74 270 top
P7  EVJ-POT  [EVJ-POT]  254,78.74 270 top
P8  EVJ-POT  [EVJ-POT]  274.32,78.74 270 top
R1  10k  [R0603]  112.39,3.17 270 top
R2  82k  [R0603]  220.34,10.79 90 top
R3  18k  [R0603]  222.25,10.79 270 top
R4  39  [R0603]  118.75,46.99 0 bottom
R5  39  [R0603]  118.75,45.09 0 bottom
R6  0  [R0603]  140.34,62.87 180 bottom
R7  0  [R0603]  135.89,58.1 270 bottom
R8  100k  [R0603]  81.92,54.29 180 bottom
R9  100k  [R0603]  132.72,10.79 180 top
R10  100k  [R0603]  132.72,12.7 180 top
R11  100k  [R0603]  132.72,16.51 180 top
R12  100k  [R0603]  132.72,14.61 180 top
R13  100k  [R0603]  132.72,20.32 180 top
R14  100k  [R0603]  132.72,18.41 180 top
R15  4.7k  [R0603]  124.46,90.17 180 bottom
R16  0  [R0603]  136.53,77.15 90 top
R17  0  [R0603]  133.99,77.15 90 top
R18  0  [R0603]  131.44,77.15 90 top
R19  47k  [R0603]  107.31,92.71 0 top
R20  47k  [R0603]  111.12,92.71 180 top
R21  150  [R0603]  360.68,68.58 180 top
R22  10k  [R0603]  120.65,90.17 0 bottom
R23  150  [R0603]  102.87,5.08 90 top
R24  0  [R0603]  87.63,62.23 180 top
R25  0  [R0603]  106.05,71.12 180 top
R26  0  [R0603]  106.05,69.22 180 top
R27  3.32k  [R0603]  107.63,73.03 0 top
R28  18k  [R0603]  242.57,10.79 270 top
R29  82k  [R0603]  240.66,10.79 90 top
R30  82k  [R0603]  260.99,10.79 90 top
R31  18k  [R0603]  262.89,10.79 90 top
R32  82k  [R0603]  281.31,10.79 90 top
R33  18k  [R0603]  283.21,10.79 90 top
R34  82k  [R0603]  363.86,74.93 90 top
R35  18k  [R0603]  365.76,74.93 90 top
R36  100k  [R0603]  158.75,101.6 0 bottom
R37  22  [R0603]  104.46,26.04 90 bottom
R38  18k  [R0603]  45.72,10.79 0 top
R39  82k  [R0603]  45.72,8.89 0 top
R40  18k  [R0603]  45.72,5.08 0 top
R41  82k  [R0603]  45.72,6.99 0 top
R42  0  [R0603]  106.05,74.93 180 top
R43  750k  [R0603]  12.38,48.58 90 top
R44  11k  [R0603]  34.29,64.77 0 top
R45  5k49  [R0603]  37.78,64.77 180 top
R46  3k32  [R0603]  34.29,66.67 180 top
R47  150  [R0603]  88.9,78.74 90 top
R48  10k  [R0603]  77.47,60.33 90 bottom
R49  0  [R0603]  83.82,9.53 270 top
R50  0  [R0603]  89.53,10.79 270 top
R51  10k  [R0603]  292.1,67.94 270 top
R52  10k  [R0603]  295.91,67.94 90 top
R53  10k  [R0603]  297.81,67.94 90 top
R54  10k  [R0603]  304.8,67.94 270 top
R55  10k  [R0603]  308.61,67.94 90 top
R56  10k  [R0603]  310.51,67.94 90 top
R57  10k  [R0603]  317.5,67.94 270 top
R58  10k  [R0603]  321.31,67.94 90 top
R59  10k  [R0603]  323.21,67.94 90 top
R60  10k  [R0603]  330.2,67.94 270 top
R61  10k  [R0603]  334.01,67.94 90 top
R62  10k  [R0603]  335.92,67.94 90 top
R63  330k  [R0603]  154.94,88.9 0 bottom
R64  100k  [R0603]  158.75,88.9 180 bottom
R65  10k  [R0603]  121.92,77.47 90 bottom
R66  10k  [R0603]  123.83,77.47 90 bottom
R67  1k  [R0603]  285.75,41.91 0 top
R70  4k7  [R0603]  85.72,9.53 270 top
R71  4k7  [R0603]  81.92,9.53 270 top
R72  10k  [R0603]  83.19,28.57 270 bottom
R73  10k  [R0603]  85.09,28.57 270 bottom
R74  33  [R0603]  81.28,60.33 90 bottom
R75  10k  [R0603]  70.8,38.42 0 bottom
R76  33  [R0603]  70.8,38.42 0 top
R77  150  [R0603]  90.81,78.74 90 top
R78  10k  [R0603]  100.97,49.85 0 bottom
R79  10k  [R0603]  100.97,47.94 0 bottom
R80  10k  [R0603]  81.92,56.2 0 bottom
R81  2k74  [R0603]  22.86,66.67 270 top
R82  11k  [R0603]  16.51,64.77 0 top
R83  5k49  [R0603]  20,64.77 180 top
R84  2k74  [R0603]  22.86,76.83 270 top
R85  3k32  [R0603]  16.51,66.67 180 top
R86  5k49  [R0603]  13.97,67.63 270 top
R87  604  [R0603]  13.97,71.44 90 top
R88  1k65  [R0603]  20,66.67 180 top
R89  49k9  [R0603]  11.43,70.48 90 bottom
R90  11k  [R0603]  16.51,82.55 0 top
R91  5k49  [R0603]  20,82.55 180 top
R92  5k49  [R0603]  31.75,67.63 270 top
R93  3k32  [R0603]  16.51,80.64 180 top
R94  5k49  [R0603]  13.97,79.69 90 top
R95  604  [R0603]  13.97,75.88 270 top
R96  1k65  [R0603]  20,80.64 180 top
R97  49k9  [R0603]  11.43,76.83 270 bottom
R98  604  [R0603]  31.75,71.44 90 top
R99  1k65  [R0603]  37.78,66.67 180 top
R100  49k9  [R0603]  29.21,70.48 90 bottom
R101  11k  [R0603]  34.29,82.55 0 top
R102  5k49  [R0603]  37.78,82.55 180 top
R103  3k32  [R0603]  34.29,80.64 180 top
R104  5k49  [R0603]  31.75,79.69 90 top
R105  604  [R0603]  31.75,75.88 270 top
R106  1k65  [R0603]  37.78,80.64 180 top
R107  49k9  [R0603]  29.21,76.83 270 bottom
R108  2k74  [R0603]  40.64,66.67 270 top
R109  2k74  [R0603]  40.64,76.83 270 top
R110  5k76  [R0603]  15.24,42.55 180 top
R111  5k76  [R0603]  19.05,42.55 180 top
R112  237  [R0603]  16.51,37.47 90 bottom
R113  5k76  [R0603]  15.24,28.57 180 top
R114  5k76  [R0603]  19.05,28.57 0 top
R115  237  [R0603]  16.51,33.66 270 bottom
R116  750k  [R0603]  12.38,29.53 90 top
R117  11k  [R0603]  34.29,27.94 0 top
R118  5k49  [R0603]  37.78,27.94 180 top
R119  3k32  [R0603]  34.29,29.84 180 top
R120  5k49  [R0603]  31.75,30.8 270 top
R121  604  [R0603]  31.75,34.61 90 top
R122  1k65  [R0603]  37.78,29.84 180 top
R123  49k9  [R0603]  29.21,33.66 90 bottom
R124  11k  [R0603]  34.29,45.72 0 top
R125  5k49  [R0603]  37.78,45.72 180 top
R126  3k32  [R0603]  34.29,43.81 180 top
R127  5k49  [R0603]  31.75,42.86 90 top
R128  604  [R0603]  31.75,39.05 270 top
R129  1k65  [R0603]  37.78,43.81 180 top
R130  49k9  [R0603]  29.21,40.01 270 bottom
R131  2k74  [R0603]  40.64,29.84 270 top
R132  2k74  [R0603]  40.64,40.01 270 top
R133  5k76  [R0603]  15.24,61.59 180 top
R134  5k76  [R0603]  19.05,61.59 180 top
R135  237  [R0603]  16.51,56.52 90 bottom
R136  5k76  [R0603]  15.24,47.62 180 top
R137  5k76  [R0603]  19.05,47.62 0 top
R138  5k76  [R0603]  54.61,66.67 0 top
R139  237  [R0603]  16.51,52.7 270 bottom
R140  5k76  [R0603]  50.8,66.67 0 top
R141  237  [R0603]  53.34,71.75 270 bottom
R142  5k76  [R0603]  54.61,80.64 0 top
R143  5k76  [R0603]  50.8,80.64 180 top
R144  237  [R0603]  53.34,75.56 90 bottom
R145  750k  [R0603]  57.47,79.69 270 top
R146  10k  [R0603]  350.52,99.69 0 top
R147  10k  [R0603]  350.52,101.6 180 top
R148  10k  [R0603]  350.52,95.89 0 top
R149  10k  [R0603]  350.52,93.98 180 top
R150  10k  [R0603]  361.95,96.84 180 top
R151  10k  [R0603]  361.95,94.93 0 top
R152  10k  [R0603]  361.95,98.74 180 top
R153  10k  [R0603]  361.95,100.65 0 top
R162  100k  [R0603]  162.56,97.16 270 bottom
R163  5k76  [R0603]  68.58,66.67 0 top
R164  562  [R0603]  53.66,34.92 180 top
R165  10k  [R0603]  63.5,39.69 90 bottom
R166  100k  [R0603]  67.31,53.34 180 top
R167  0  [R0603]  84.77,42.86 90 bottom
R168  0  [R0603]  86.68,42.86 90 bottom
R169  5k76  [R0603]  64.77,66.67 0 top
R170  237  [R0603]  67.31,71.75 270 bottom
R171  5k76  [R0603]  68.58,80.64 0 top
R172  5k76  [R0603]  64.77,80.64 180 top
R173  237  [R0603]  67.31,75.56 90 bottom
R174  750k  [R0603]  71.44,79.69 270 top
U1  AT32UC3A0512  [LQFP144]  133.35,55.88 180 top
U2  FT232RL  [SSOP28]  120.65,85.72 90 top
U3  CY62167EV30-Z  [TSOP48]  157.48,55.88 0 top
U4  TPS2020  [SO08]  109.22,88.9 90 top
U5  AD7923  [TSSOP16]  280.67,39.37 0 top
U6  LM2678  [TO263-7]  146.05,87.63 0 top
U7  ADP3339  [SOT223]  133.99,83.5 180 top
U8  ADP3339  [SOT223]  96.52,74.93 90 top
U9  MT48LC32M16A2tg-75  [TSOP54]  101.6,20.32 0 top
U10  LM4040M3  [SOT23]  285.75,37.47 90 top
U14  AD1939  [SQFP-S-10X10-64]  62.23,43.18 0 top
U17  AD5686R  [TSSOP16]  67.94,22.23 270 top
U18  FDS9431A  [SO08]  100.97,64.14 0 top
U19  74HC14D  [SO14]  298.45,18.41 90 top
U20  SN74LVC2G14  [SOT23-6]  50.8,5.08 270 top
U21  LM2674  [SO08]  167,97.16 0 bottom
U22  BAS70-04  [SOT23]  297.81,64.14 270 top
U23  BAS70-04  [SOT23]  310.51,64.14 270 top
U24  BAS70-04  [SOT23]  323.21,64.14 270 top
U25  BAS70-04  [SOT23]  335.92,64.14 270 top
U$1  PANASONIC-EVQ  [PANASONIC-EVQ]  109.22,5.08 270 top
U$2  BOURNS-EM14  [BOURNS-EM14]  351.79,17.78 0 bottom
U$3  BOURNS-EM14  [BOURNS-EM14]  316.23,18.42 0 bottom
U$4  BOURNS-EM14  [BOURNS-EM14]  334.01,48.9 0 bottom
U$5  BOURNS-EM14  [BOURNS-EM14]  298.45,48.26 0 bottom
U$6  SDMMC06132  [06132]  149.86,25.4 0 top
U$10  NHD-2.7  [NHD-2.7]  243.84,17.14 180 top
VDDINT  TPS-SMD-10R  [SMD-10R]  92.71,62.23 0 top
VDDOUT  TPS-SMD-10R  [SMD-10R]  135.57,68.58 180 top
Y1  12mhz  [HC49UP@1]  133.35,36.83 0 top
Y2  ASFL1-27mhz  [ASFL1]  79.38,62.87 0 top
Y3  ASFL1-12.288mhz  [ASFL1]  69.53,34.92 0 top

## Library data of the parts
3V3 3V3C 5V GND VDDINT VDDOUT = testpoint
BM0 BM1 C1-C190 C199-C206 L3-L8 L10 R1-R67 R70-R153 R162-R174 = rc-master-smd
D1-D8 U10 U22-U25 = diode
DSP1 J1 J4 J5 J8-J12 J15-J22 K0 K1-K3 KM P5-P8 U4-U9 U14 U17 U18 U20 U21 U$1-U$6 U$10 = monome-inc
GND0 JP4 = pinhead
IC1-IC8 = analog-devices; MPN: AD8607ARMZ-R2; OC_FARNELL: 1651293; OC_NEWARK: 19M8927
IC9 = analog-devices; MPN: AD8544ARUZ; OC_FARNELL: unknown; OC_NEWARK: 15P1001
J2 = con-cuistack
J3 J6 J7 = Audio Jacks 0.25 inch
JP1 U1 = atmel-avr32
JP8 = jumpers
L1 L9 = inductor-coilcraft
L2 = inductor-bourns
LED1-LED12 = led
P1-P4 = con-headers-jp
U2 = ftdi-chip
U3 = memory-cypress
U19 = 74xx-us
Y1-Y3 = crystal

## Nets
+3V3: 3V3.TP C35.1 C37.1 C41.1 C70.2 C71.+ C125.2 C127.+ JP1.4 JP4.2 LED1.A LED2.A P1.25 P2.25 R1.2 R9.2 R10.2 R11.2 R12.2 R13.2 R14.2 R18.1 R65.1 R66.1 U2.4 U3.12 U3.37 U5.15 U$6.4
+3V3A: C39.2 C103.2 C134.2 C140.2 C143.1 C144.1 C145.1 C146.1 C149.2 C168.2 C174.2 C188.1 C190.+ C201.2 IC1.8 IC2.8 IC3.8 IC4.8 IC5.8 IC6.8 IC7.8 IC8.8 L7.1 R164.2 U14.5 U14.45 U14.51 U14.62
+3V3C: 3V3C.TP C42.2 C96.1 C97.1 C142.1 C179.2 C180.2 C181.2 C182.2 C183.2 C184.2 C189.1 L7.2 R8.2 R42.1 R47.2 R48.2 R71.1 R72.2 R73.2 R75.2 R77.2 R78.2 R79.2 R166.1 U9.1 U9.3 U9.9 U9.14 U9.27 U9.43 U9.49 U14.17 U14.32 U17.11 Y2.4 Y3.4
+5V: 5V.TP C2.2 C3.+ C34.2 C46.1 C47.2 C48.+ C53.2 C54.+ C60.2 C61.2 C62.2 C63.2 C120.1 C121.+ C126.2 C128.+ L1.2 L10.2 P1.26 P2.26 R2.1 R19.2 R20.2 R29.1 R30.1 R32.1 R34.1 R39.1 R41.1 U2.20 U4.2 U4.3 U6.6 U7.3 U8.3 U17.5 U17.10 U19.14 U20.5 U$2.P$5 U$3.P$5 U$4.P$5 U$5.P$5
+5VA: C68.2 C69.+ L10.1 R51.2 R54.2 R57.2 R60.2 R67.1 U5.5 U5.6 U22.2 U23.2 U24.2 U25.2
+12V: C176.+ C178.1 IC9.4 L9.2 P1.24 P2.24 U21.4
A-A1: U1.118 U3.25
A-A2: U1.114 U3.24
A-A3: U1.112 U3.23
A-A4: U1.110 U3.22
A-A5: U1.107 U3.21
A-A6: U1.105 U3.20
A-A7: U1.103 U3.19
A-A8: U1.101 U3.18
A-A9: U1.99 U3.8
A-A10: U1.97 U3.7
A-A11: U1.95 U3.6
A-A12: U1.91 U3.5
A-A13: U1.89 U3.4
A-A14: U1.87 U3.3
A-A15: U1.67 U3.2
A-A16: U1.65 U3.1
A-A17: U1.63 U3.48
A-A18: U1.61 U3.17
A-A19: U1.59 U3.16
A-D0: U1.38 U3.29
A-D1: U1.35 U3.31
A-D2: U1.33 U3.33
A-D3: U1.31 U3.35
A-D4: U1.26 U3.38
A-D5: U1.24 U3.40
A-D6: U1.12 U3.42
A-D7: U1.10 U3.44
A-D8: U1.4 U3.30
A-D9: U1.2 U3.32
A-D10: U1.1 U3.34
A-D11: U1.144 U3.36
A-D12: U1.142 U3.39
A-D13: U1.140 U3.41
A-D14: U1.137 U3.43
A-D15: U1.135 U3.45
A-RESET: C1.1 JP1.6 R1.1 U1.23 U$1.2
A-TCK: JP1.1 U1.129
A-TDI: JP1.9 U1.131
A-TDO: JP1.3 U1.130
A-TMS: JP1.5 U1.128
ABE0_: DSP1.P$151 U9.15
ABE1_: DSP1.P$150 U9.39
AD1939_RESET: DSP1.P$50 R165.1 U14.14
AGND: C39.1 C64.2 C65.2 C66.2 C67.2 C68.1 C69.- C72.1 C95.1 C98.2 C99.1 C100.- C101.1 C102.- C103.1 C104.1 C105.2 C107.1 C108.1 C110.1 C111.2 C113.1 C114.1 C117.1 C118.1 C120.2 C121.- C122.1 C123.2 C129.1 C130.1 C133.1 C134.1 C137.2 C138.1 C140.1 C141.1 C143.2 C144.2 C145.2 C146.2 C148.1 C149.1 C152.2 C153.1 C155.2 C157.1 C158.1 C160.1 C161.2 C163.1 C164.1 C167.1 C168.1 C171.2 C172.1 C174.1 C178.2 C190.- C200.1 C201.1 C204.2 C205.1 IC1.4 IC2.4 IC3.4 IC4.4 IC5.4 IC6.4 IC7.4 IC8.4 IC9.11 J3.RN J3.S J3.TN J4.G J4.RNB J4.RNT J4.SB J4.SNB J4.SNT J4.ST J4.TNB J4.TNT J5.G J5.RNB J5.RNT J5.SB J5.SNB J5.SNT J5.ST J5.TNB J5.TNT J11.RNB J11.RNT J11.SB J11.SNB J11.SNT J11.ST J11.TNB J11.TNT J12.G J12.RNB J12.RNT J12.SB J12.SNB J12.SNT J12.ST J12.TNB J12.TNT J15.3 J15.5 J16.3 J16.5 J17.3 J17.5 J18.3 J18.5 J19.5 J20.5 J21.5 J22.5 L8.1 P3.13 P3.14 P4.13 P4.14 R43.2 R53.2 R56.2 R59.2 R62.2 R89.2 R97.2 R100.2 R107.2 R116.2 R123.2 R130.2 R145.2 R146.2 R148.2 R150.2 R152.2 R174.2 U5.4 U5.8 U5.13 U5.16 U10.2 U14.1 U14.4 U14.44 U14.46 U14.48 U17.4 U17.16 U22.1 U23.1 U24.1 U25.1
B-A1: DSP1.P$149 U9.23
B-A2: DSP1.P$148 U9.24
B-A3: DSP1.P$147 U9.25
B-A4: DSP1.P$146 U9.26
B-A5: DSP1.P$142 U9.29
B-A6: DSP1.P$141 U9.30
B-A7: DSP1.P$140 U9.31
B-A8: DSP1.P$139 U9.32
B-A9: DSP1.P$138 U9.33
B-A10: DSP1.P$137 U9.34
B-A12: DSP1.P$135 U9.35
B-A13: DSP1.P$127 U9.36
B-A18: DSP1.P$122 U9.20
B-A19: DSP1.P$121 U9.21
B-D0: DSP1.P$116 U9.2
B-D1: DSP1.P$115 U9.4
B-D2: DSP1.P$114 U9.5
B-D3: DSP1.P$113 U9.7
B-D4: DSP1.P$112 U9.8
B-D5: DSP1.P$110 U9.10
B-D6: DSP1.P$109 U9.11
B-D7: DSP1.P$108 U9.13
B-D8: DSP1.P$105 U9.42
B-D9: DSP1.P$104 U9.44
B-D10: DSP1.P$103 U9.45
B-D11: DSP1.P$102 U9.47
B-D12: DSP1.P$101 U9.48
B-D13: DSP1.P$100 U9.50
B-D14: DSP1.P$99 U9.51
B-D15: DSP1.P$98 U9.53
B-HWAIT: DSP1.P$49 R80.2 U1.39
B-MISO: DSP1.P$54 U1.50 U14.31
B-MOSI: DSP1.P$55 U1.53 U14.30
B-RESET: DSP1.P$13 U1.41
B-SCK: DSP1.P$53 U1.54 U14.34
B-SPISEL4: DSP1.P$47 R166.2 U14.35
B-SPISS: DSP1.P$51 R8.1 U1.48
BMODE0: BM0.2 DSP1.P$96 R73.1
BMODE1: BM1.2 DSP1.P$95 R72.1
CLKIN: DSP1.P$10 R74.1
CLKOUT: DSP1.P$169 R37.2
CS1: U1.46 U3.26
CVOUT1: P3.15 U17.3
CVOUT1^: IC9.3 P4.15
CVOUT2: P3.16 U17.2
CVOUT2^: IC9.5 P4.16
CVOUT3: P3.18 U17.6
CVOUT3^: IC9.10 P4.18
CVOUT4: P3.17 U17.7
CVOUT4^: IC9.12 P4.17
DAC-LDAC: DSP1.P$37 U17.9
DAC-RESET: DSP1.P$38 U17.15
DM: J8.2 R4.2
DP: J8.3 R5.2
DR0PRI: DSP1.P$74 U14.27
DR0SEC: DSP1.P$73 U14.26
DT0PRI: DSP1.P$68 U14.20
DT0SEC: DSP1.P$67 U14.19
DT1PRI: DSP1.P$59
DT1SEC: DSP1.P$58 U17.14
EMU_: DSP1.P$83 R49.1
ENC0A: P1.7 U1.98
ENC0A^: P2.7 U$2.P$2
ENC0B: P1.8 U1.96
ENC0B^: P2.8 U$2.P$6
ENC1A: P1.5 U1.102
ENC1A^: P2.5 U$3.P$2
ENC1B: P1.6 U1.100
ENC1B^: P2.6 U$3.P$6
ENC2A: P1.3 U1.106
ENC2A^: P2.3 U$4.P$2
ENC2B: P1.4 U1.104
ENC2B^: P2.4 U$4.P$6
ENC3A: P1.1 U1.113
ENC3A^: P2.1 U$5.P$2
ENC3B: P1.2 U1.111
ENC3B^: P2.2 U$5.P$6
FTDI-CTS: U1.34 U2.3
FTDI-RTS: U1.32 U2.11
FTDI-RX: U1.25 U2.1
FTDI-TX: U1.27 U2.5
GND: BM0.1 BM1.1 C1.2 C2.1 C3.- C4.2 C5.2 C6.2 C7.2 C8.2 C9.2 C10.2 C11.2 C12.2 C13.2 C14.2 C15.2 C16.2 C17.2 C18.2 C19.2 C20.2 C21.2 C22.2 C23.2 C24.2 C25.2 C26.2 C27.2 C28.2 C29.2 C30.2 C31.2 C32.2 C33.2 C34.1 C35.2 C36.1 C37.2 C38.1 C40.2 C41.2 C42.1 C43.1 C44.1 C46.2 C47.1 C48.- C49.- C50.1 C51.- C52.1 C53.1 C54.- C55.1 C56.1 C57.1 C58.1 C59.1 C60.1 C61.1 C62.1 C63.1 C70.1 C71.- C73.- C74.1 C75.- C76.- C77.- C78.- C79.1 C80.1 C81.1 C82.1 C83.1 C84.1 C85.1 C86.1 C87.1 C88.1 C89.1 C90.1 C91.1 C92.1 C93.1 C94.1 C96.2 C97.2 C125.1 C126.1 C127.- C128.- C142.2 C175.- C176.- C179.1 C180.1 C181.1 C182.1 C183.1 C184.1 C185.- C186.- C189.2 D2.A D7.1 D8.A DSP1.P$1 DSP1.P$2 DSP1.P$3 DSP1.P$7 DSP1.P$8 DSP1.P$9 DSP1.P$14 DSP1.P$15 DSP1.P$17 DSP1.P$19 DSP1.P$30 DSP1.P$39 DSP1.P$40 DSP1.P$41 DSP1.P$42 DSP1.P$43 DSP1.P$44 DSP1.P$56 DSP1.P$70 DSP1.P$88 DSP1.P$89 DSP1.P$90 DSP1.P$91 DSP1.P$92 DSP1.P$97 DSP1.P$106 DSP1.P$117 DSP1.P$128 DSP1.P$129 DSP1.P$130 DSP1.P$131 DSP1.P$132 DSP1.P$133 DSP1.P$144 DSP1.P$155 DSP1.P$170 DSP1.P$174 DSP1.P$175 DSP1.P$176 GND0.1 GND.TP J1.1 J2.2 J6.R J6.RN J6.S J6.TN J7.R J7.RN J7.S J7.TN J8.4 J8.G1 J8.G2 J8.G3 J8.G4 J9.GND J10._1 JP1.2 JP1.10 JP4.1 JP4.5 JP4.6 JP4.10 JP4.11 JP4.12 JP4.13 JP4.14 JP4.19 JP4.20 JP8.1 JP8.4 JP8.7 JP8.9 JP8.11 JP8.13 K0.2 K0.3 K1.2 K1.3 K2.2 K2.3 K3.2 K3.3 KM.2 KM.3 L8.2 P1.23 P1.27 P1.28 P2.23 P2.27 P2.28 R22.2 R23.1 R27.2 R36.2 R64.2 R70.2 R80.1 R165.2 U1.8 U1.18 U1.28 U1.37 U1.52 U1.72 U1.73 U1.82 U1.83 U1.85 U1.86 U1.94 U1.109 U1.117 U1.132 U1.133 U2.7 U2.18 U2.21 U2.25 U3.27 U3.46 U3.47 U4.1 U6.4 U6.8 U7.1 U8.1 U9.6 U9.12 U9.28 U9.41 U9.46 U9.52 U9.54 U14.16 U14.23 U14.24 U14.25 U14.33 U19.5 U19.7 U20.2 U21.6 U$1.1 U$2.P$1 U$3.P$1 U$4.P$1 U$5.P$1 U$6.3 U$6.6 U$6.GP Y2.2 Y3.2
HBE: U1.40 U3.14
HP-L: J3.R P3.9
HP-L^: P4.9
HP-LP: C165.- P3.10 R130.1
HP-LP^: P4.10
HP-R: J3.T P3.11
HP-R^: P4.11
HP-RP: C159.- P3.12 R123.1
HP-RP^: P4.12
HPL+: R125.2 U14.6
HPL-: R124.2 U14.7
HPR+: R118.2 U14.8
HPR-: R117.2 U14.9
IN1-L: J4.TT P3.5
IN1-L^: P4.5
IN1-LP: L3.2 P3.6
IN1-LP^: P4.6
IN1-R: J5.TT P3.7
IN1-R^: P4.7
IN1-RP: L4.2 P3.8
IN1-RP^: P4.8
IN1L+: C153.2 C154.2 R139.1 U14.53
IN1L-: C152.1 C154.1 R135.1 U14.54
IN1R+: C138.2 C139.2 R115.1 U14.55
IN1R-: C137.1 C139.1 R112.1 U14.56
IN2-L: J11.TT L5.2
IN2-R: J12.TT L6.2
IN2L+: C172.2 C173.2 R144.1 U14.57
IN2L-: C171.1 C173.1 R141.1 U14.58
IN2R+: C205.2 C206.2 R173.1 U14.59
IN2R-: C204.1 C206.1 R170.1 U14.60
KEY0: P1.12 U1.77
KEY0^: P2.12 U19.8
KEY1: P1.11 U1.78
KEY1^: P2.11 U19.10
KEY2: P1.10 U1.79
KEY2^: P2.10 U19.12
KEY3: P1.9 U1.80
KEY3^: P2.9 U19.2
LBE: U1.120 U3.15
MMC-DETECT: R13.1 U1.88 U$6.CD
MMC-PROTECT: R14.1 U1.90 U$6.WP
MODE-KEY: P1.13 U1.76
MODE-KEY^: P2.13 U19.4
MODE-LED: P1.14 U1.75
MODE-LED^: P2.14 R21.1
N$1: IC9.2 R146.1 R147.2
N$2: K0.1 K0.4 R2.2 R3.1
N$3: D1.A J2.1
N$4: C32.1 U1.124 Y1.2
N$5: C33.1 U1.125 Y1.1
N$6: R15.1 R22.1 U2.19
N$7: C45.1 D2.C L1.1 U6.1
N$8: C55.2 R3.2 U19.9
N$9: C45.2 U6.3
N$10: K1.1 K1.4 R28.1 R29.2
N$11: C56.2 R28.2 U19.11
N$12: J9.DM U2.16
N$13: J9.DP U2.15
N$14: C52.2 U2.17
N$15: LED2.C R23.2
N$16: C73.+ R25.2 R26.2 R42.2 U8.2 U8.4
N$17: J9.VCC R15.2
N$18: C74.2 C185.+ C186.+ R26.1 U18.1 U18.2 U18.3
N$19: D7.3 L2.1 U18.5 U18.6 U18.7 U18.8
N$20: LED1.C R21.2
N$21: K2.1 K2.4 R30.2 R31.2
N$22: C75.+ L2.2 R24.2
N$23: C57.2 R31.1 U19.13
N$24: R37.1 U9.38
N$25: R48.1 Y2.1
N$26: JP8.2 R49.2
N$27: K3.1 K3.4 R32.2 R33.2
N$28: JP8.5 R71.2
N$29: DSP1.P$163 R78.1
N$30: C58.2 R33.1 U19.1
N$31: JP8.14 R50.2
N$32: C49.+ R16.2 R17.2 R18.2 U7.2 U7.4
N$33: J17.1 R57.1
N$34: D3.A J15.4
N$35: DSP1.P$162 R79.1
N$36: R75.1 Y3.1
N$37: D4.C R55.2
N$38: R74.2 Y2.3
N$39: D3.C R52.2
N$40: D5.C R58.2
N$41: J16.1 R54.1
N$42: D4.A J16.4
N$43: KM.1 KM.4 R34.2 R35.2
N$44: R4.1 U1.70
N$45: R5.1 U1.71
N$46: D6.C R61.2
N$47: J15.1 R51.1
N$48: D5.A J17.4
N$49: C59.2 R35.1 U19.3
N$50: J10.1 R36.1
N$51: J18.1 R60.1
N$52: D6.A J18.4
N$53: C147.+ R133.2
N$54: C38.2 R40.2 U20.3
N$55: J10.2 R63.1 R64.1
N$56: IC9.1 J21.4 R147.1
N$57: R76.2 Y3.3
N$58: C72.2 R67.2 U5.7 U10.1
N$59: R76.1 U14.2
N$60: DSP1.P$27 LED3.C
N$61: C101.2 C102.+ IC7.3 U14.47
N$62: C99.2 C100.+ U14.52
N$63: C187.2 C188.2 U14.61
N$64: DSP1.P$28 LED4.C
N$65: C187.1 R164.1
N$66: LED3.A R77.1
N$67: LED4.A R47.1
N$68: C104.2 R82.1 R85.2 R86.2
N$69: C105.1 R81.1 R83.1 R88.1
N$70: C107.2 IC3.3 R88.2
N$71: C106.2 IC3.1 R86.1 R87.1
N$72: C108.2 C109.+ R87.2
N$73: C110.2 R90.1 R93.2 R94.2
N$74: C106.1 IC3.2 R85.1
N$75: C111.1 R84.1 R91.1 R96.1
N$76: C113.2 IC3.5 R96.2
N$77: C112.2 IC3.7 R94.1 R95.1
N$78: C114.2 C115.+ R95.2
N$79: C112.1 IC3.6 R93.1
N$80: C95.2 R44.1 R46.2 R92.2
N$81: C98.1 R45.1 R99.1 R108.1
N$82: C117.2 IC1.3 R99.2
N$83: C116.2 IC1.1 R92.1 R98.1
N$84: C118.2 C119.+ R98.2
N$85: C116.1 IC1.2 R46.1
N$86: C122.2 R101.1 R103.2 R104.2
N$87: C123.1 R102.1 R106.1 R109.1
N$88: C129.2 IC1.5 R106.2
N$92: C124.2 IC1.7 R104.1 R105.1
N$94: C130.2 C131.+ R105.2
N$95: C124.1 IC1.6 R103.1
N$96: C135.1 IC2.1 R111.1 R112.2 R114.2
N$97: C136.1 IC2.7 R113.1 R115.2
N$98: C132.- C133.2 L4.1
N$99: C135.2 IC2.2 R110.1 R111.2
N$100: C136.2 IC2.6 R113.2 R114.1 R116.1
N$101: C132.+ R110.2
N$102: C141.2 R117.1 R119.2 R120.2
N$103: C155.1 R118.1 R122.1 R131.1
N$104: C150.1 IC6.1 R134.1 R135.2 R137.2
N$105: C151.1 IC6.7 R136.1 R139.2
N$106: C147.- C148.2 L3.1
N$107: C157.2 IC4.3 R122.2
N$108: C150.2 IC6.2 R133.1 R134.2
N$109: C156.2 IC4.1 R120.1 R121.1
N$110: C151.2 IC6.6 R43.1 R136.2 R137.1
N$111: C158.2 C159.+ R121.2
N$112: C156.1 IC4.2 R119.1
N$113: C160.2 R124.1 R126.2 R127.2
N$114: C161.1 R125.1 R129.1 R132.1
N$115: C163.2 IC4.5 R129.2
N$116: C65.1 R55.1 R56.1 U5.11 U23.3
N$117: C66.1 R58.1 R59.1 U5.10 U24.3
N$118: C67.1 R61.1 R62.1 U5.9 U25.3
N$119: C64.1 R52.1 R53.1 U5.12 U22.3
N$120: C162.2 IC4.7 R127.1 R128.1
N$121: C164.2 C165.+ R128.2
N$122: C162.1 IC4.6 R126.1
N$123: C169.1 IC5.1 R140.1 R141.2 R143.2
N$124: C36.2 R38.2 U20.1
N$125: C170.1 IC5.7 R142.1 R144.2
N$126: C166.- C167.2 L5.1
N$127: C169.2 IC5.2 R138.1 R140.2
N$128: C170.2 IC5.6 R142.2 R143.1 R145.1
N$129: C166.+ R138.2
N$131: IC7.6 IC7.7
N$132: IC9.6 R148.1 R149.2
N$133: C177.1 U21.1
N$134: C177.2 D8.C L9.1 U21.8
N$135: IC9.9 R150.1 R151.2
N$136: IC9.13 R152.1 R153.2
N$137: IC9.8 J19.4 R151.1
N$138: IC9.14 J20.4 R153.1
N$139: IC9.7 J22.4 R149.1
N$142: C202.1 IC8.1 R169.1 R170.2 R172.2
N$143: C203.1 IC8.7 R171.1 R173.2
N$144: C199.- C200.2 L6.1
N$145: C202.2 IC8.2 R163.1 R169.2
N$146: C203.2 IC8.6 R171.2 R172.1 R174.1
N$147: C199.+ R163.2
OLED-DC: P1.15 U1.47
OLED-DC^: JP4.4 P2.15
OLED-RES: P1.16 U1.43
OLED-RES^: JP4.16 P2.16
OUT1-L: J4.TB P3.1
OUT1-L^: P4.1
OUT1-LP: C115.- P3.2 R97.1
OUT1-LP^: P4.2
OUT1-R: J5.TB P3.3
OUT1-R^: P4.3
OUT1-RP: C109.- P3.4 R89.1
OUT1-RP^: P4.4
OUT1L+: R91.2 U14.36
OUT1L-: R90.2 U14.37
OUT1R+: R83.2 U14.38
OUT1R-: R82.2 U14.39
OUT2-L: C131.- J11.TB R107.1
OUT2-R: C119.- J12.TB R100.1
OUT2L+: R102.2 U14.40
OUT2L-: R101.2 U14.41
OUT2R+: R45.2 U14.42
OUT2R-: R44.2 U14.43
POWER_CON: R162.2 U1.134
POWER_ON: J10.0 R162.1 U6.7 U21.5
POWER_SW: J10._0 U1.136
RD: U1.44 U3.28
RFS0: DSP1.P$75 R168.1 U14.29
RSCLK0: DSP1.P$76 R167.1 U14.28
SA10: DSP1.P$164 U9.22
SCAS_: DSP1.P$166 U9.17
SCKE: DSP1.P$173 U9.37
SCL: J1.3 R66.2 U1.123
SDA: J1.2 R65.2 U1.122
SH-RCK: DSP1.P$34
SH-SCK: DSP1.P$35
SH-SER: DSP1.P$36
SMS_: DSP1.P$172 U9.19
SPI1-CS0: P1.17 U1.56
SPI1-CS0^: JP4.17 P2.17
SPI1-CS1: P1.18 U1.62
SPI1-CS1^: P2.18 U5.3
SPI1-CS2: R9.1 U1.64 U$6.1
SPI1-MISO: P1.20 R11.1 U1.60 U$6.7
SPI1-MISO^: P2.20 U5.14
SPI1-MOSI: P1.21 R10.1 U1.58 U$6.2
SPI1-MOSI^: JP4.8 P2.21 U5.2
SPI1-SCK: P1.22 R12.1 U1.57 U$6.5
SPI1-SCK^: JP4.7 P2.22 U5.1
SRAS_: DSP1.P$167 U9.18
SW0: U1.21 U20.4
SW0CON^: J7.T R38.1 R39.2
SW1: U1.22 U20.6
SW1CON^: J6.T R40.1 R41.2
SWE_: DSP1.P$165 U9.16
TCK: DSP1.P$94 JP8.8
TDI: DSP1.P$86 JP8.12
TDO: DSP1.P$87 R50.1
TFS0: DSP1.P$69 R168.2 U14.22
TFS1: DSP1.P$60 U17.13
TMS: DSP1.P$85 JP8.6
TRST_: DSP1.P$84 JP8.10 R70.1
TSCLK0: DSP1.P$72 R167.2 U14.21
TSCLK1: DSP1.P$61 U17.12
UNREG_IN: C43.2 C44.2 C175.+ D1.C R63.2 U6.2 U21.7
USB-OC: R19.1 U1.66 U4.5
USB-VBOF: R20.1 U1.74 U4.4
VBUS: C50.2 C51.+ J8.1 U1.68 U4.6 U4.7 U4.8
VDDCORE: C23.1 C24.1 C25.1 C26.1 C27.1 C28.1 C29.1 C30.1 C31.1 C40.1 R6.2 U1.29 U1.51 U1.55 U1.138
VDDEXT: C76.+ C77.+ C78.+ C79.2 C80.2 C81.2 C82.2 C83.2 C84.2 C85.2 C86.2 C87.2 C88.2 DSP1.P$6 DSP1.P$12 DSP1.P$18 DSP1.P$20 DSP1.P$31 DSP1.P$45 DSP1.P$57 DSP1.P$71 DSP1.P$93 DSP1.P$107 DSP1.P$118 DSP1.P$134 DSP1.P$145 DSP1.P$156 DSP1.P$171 R25.1 R27.1
VDDIN: C15.1 C16.1 C17.1 R17.1 U1.17
VDDINT: C89.2 C90.2 C91.2 C92.2 C93.2 C94.2 DSP1.P$25 DSP1.P$52 DSP1.P$66 DSP1.P$80 DSP1.P$111 DSP1.P$143 DSP1.P$157 DSP1.P$168 R24.1 VDDINT.TP
VDDIO: C4.1 C5.1 C6.1 C7.1 C8.1 C9.1 C10.1 C11.1 C12.1 C13.1 C14.1 R16.1 U1.7 U1.36 U1.69 U1.81 U1.92 U1.93 U1.108 U1.116
VDDOUT: C18.1 C19.1 R6.1 R7.1 U1.16 VDDOUT.TP
VDDSYS: C20.1 C21.1 C22.1 R7.2 U1.84
VREF: IC2.3 IC2.5 IC5.3 IC5.5 IC6.3 IC6.5 IC7.1 IC7.2 IC7.5 IC8.3 IC8.5 R81.2 R84.2 R108.2 R109.2 R131.2 R132.2
VROUT: DSP1.P$4 DSP1.P$5 U18.4
WE: U1.42 U3.11

## Tracks (layer width: path | path; a pad name or v marks a point on that pad's centre or on a via)
+3V3  (via drill 0.38, 0.6, 0.7)  (1 unrouted)
  Top 0.152: R13.2 R14.2 R11.2 R12.2 R10.2 R9.2 v130.81,10.79